# EAGLE board Motor Driver Rev 1.4 (EAGLE 7.6.0)
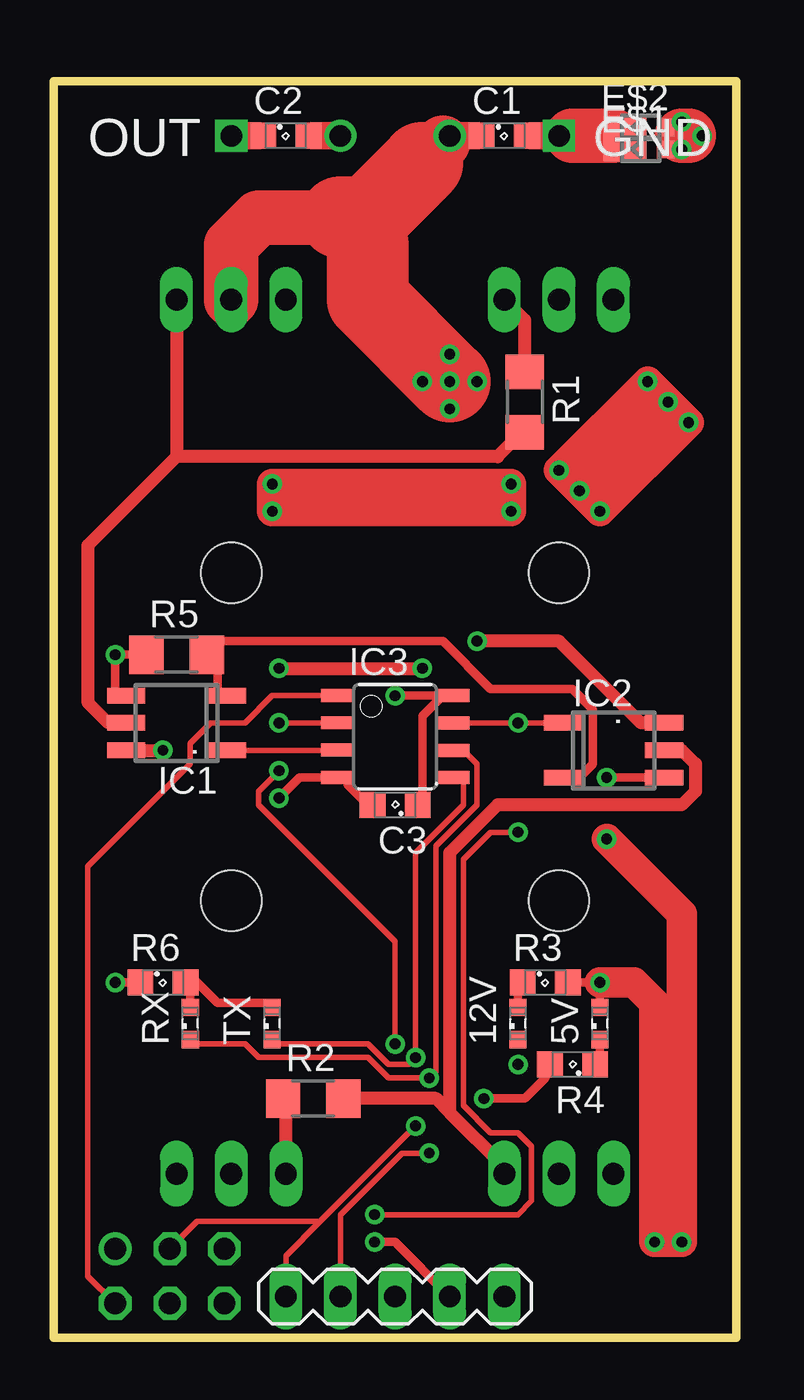
[diagram p0: board, top side]
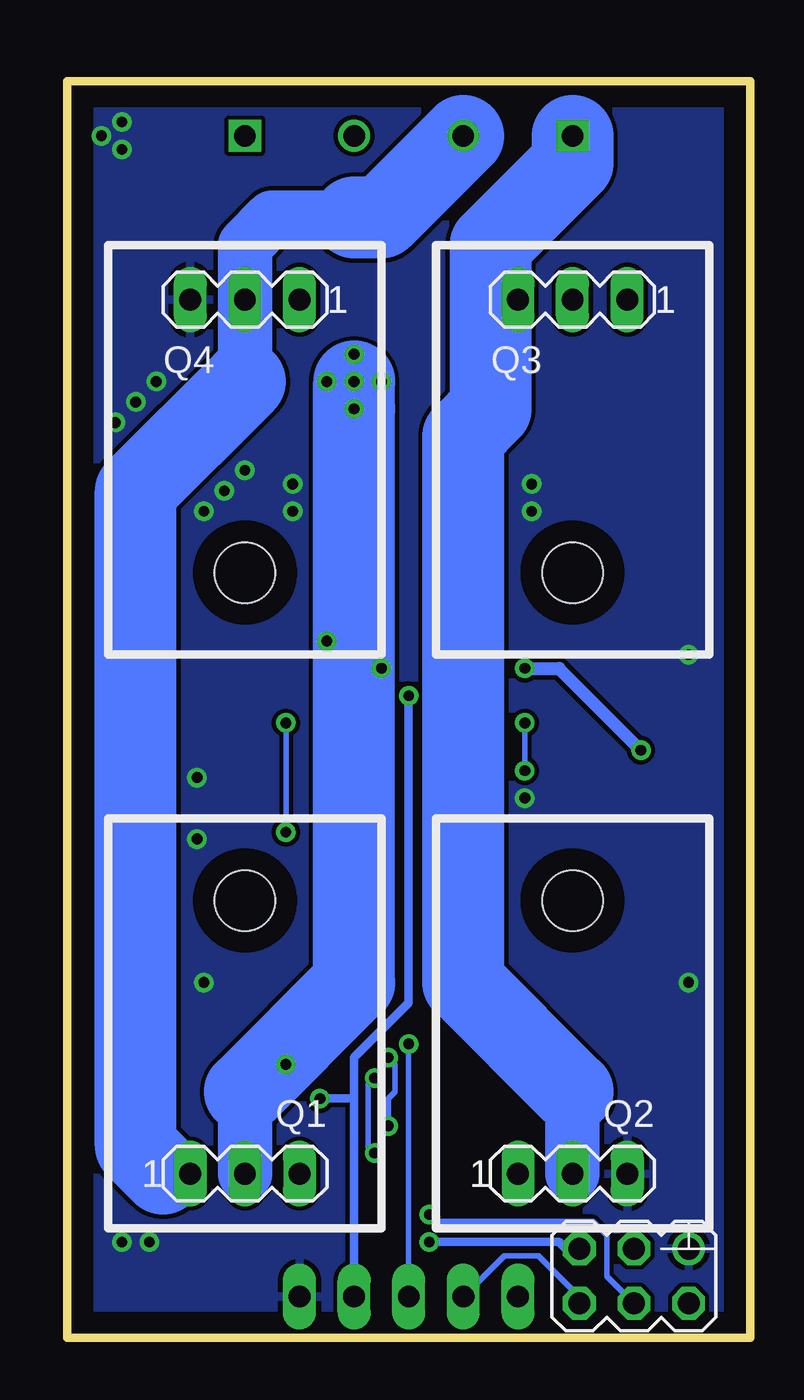
[diagram p1: board, bottom side, seen from below]

Size 31.75 x 58.42 mm. Coordinates in mm from the lower left corner, seen from the top.
Outline: 0,0 31.75,0 31.75,58.42 0,58.42 0,0
Copper layers (1*16): Top 0.035mm / dielectric 1.5mm / Bottom 0.035mm
Design rules "default": minimum track width 10mil, minimum drill 24mil, track to track 8mil, track to pad 8mil, pad to pad 8mil, via to via 8mil, smd to smd 8mil, copper to edge 40mil, drill to drill 8mil, minimum pad ring 10mil, minimum via ring 8mil, stop-mask expansion 4mil, vias tented up to drill 0mil, thermal gap 10mil
Holes 2.8 mm at 23.5,35.56 8.25,35.56 23.5,20.32 8.25,20.32

## Footprints (pad centres in the part's own frame; a part is rotated, then mirrored left to right if it is on the bottom)
SML0603 = smd 0.8 x 0.8: A 0.75,0; C -0.75,0
SML0805 = smd 1.2 x 1.2: A 1.05,0; C -1.05,0
POWERDI323 = smd 0.8 x 0.8: A 1.15,0 | smd 2 x 1.1: C -0.75,0
MA05-1 = drill 1.016 long: 2 -2.54,0; 3 0,0; 4 2.54,0; 5 5.08,0; GND -5.08,0
MA03-2 = drill 1.016 octagon: 2 -2.54,1.27; 3 0,-1.27; 4 0,1.27; 5 2.54,-1.27; 6 2.54,1.27 | drill 1.016: GND -2.54,-1.27
SOIC-6-5 = smd 0.72 x 1.78: 1 -1.905,-2.35; 3 0.635,-2.35; 6 0.635,2.35; 7 -0.635,2.35; 8 -1.905,2.35
8S1 = smd 0.6 x 1.6: 1 -1.905,-2.654; 2 -0.645,-2.654; 3 0.625,-2.654; 4 1.895,-2.654; 5 1.905,2.654; 6 0.635,2.654; 7 -0.635,2.654; 8 -1.905,2.654
MA03-1 = drill 1.016 long: 2 0,0; 3 2.54,0; GND -2.54,0
PT1206 = smd 1.6 x 1: 1A -1.4,-0.4; 1B -1.4,0.4; 2A 1.4,-0.4; 2B 1.4,0.4

## Placement (x,y rotation side)
5V  [SML0603]  25.4,14.6 90 top
12V  [SML0603]  21.59,14.6 90 top
C1  [SML0805]  20.95,55.88 0 top
C2  [SML0805]  10.8,55.88 0 top
C3  [SML0805]  15.88,24.77 180 top
E$1  [POWERDI323]  27.3,55.24 0 top  (not fitted)
E$2  [POWERDI323]  27.3,56.26 0 top  (not fitted)
E$3  [MA05-1]  15.88,1.91 0 top
E$4  [MA03-2]  5.4,2.86 180 bottom
IC1  [SOIC-6-5]  5.72,29.21 90 top
IC2  [SOIC-6-5]  26.03,26.67 270 top
IC3  [8S1]  15.88,27.94 270 top
Q1  [MA03-1]  23.5,7.62 180 bottom
Q2  [MA03-1]  8.25,7.62 180 bottom
Q3  [MA03-1]  8.25,48.26 0 bottom
Q4  [MA03-1]  23.5,48.26 0 bottom
R1  [PT1206]  21.91,43.5 270 top
R2  [PT1206]  12.06,11.11 0 top
R3  [SML0805]  22.86,16.51 0 top
R4  [SML0805]  24.13,12.7 180 top
R5  [PT1206]  5.72,31.75 0 top
R6  [SML0805]  5.08,16.51 0 top
RX  [SML0603]  6.35,14.6 90 top
TX  [SML0603]  10.16,14.6 90 top

## Library data of the parts
5V 12V C1-C3 R3 R4 R6 RX TX = led
E$1 E$2 = diode
E$3 E$4 Q1-Q4 = con-lstb
IC1 IC2 = ir
IC3 = atmel
R1 R2 R5 = sensor-heraeus

## Nets
GND: E$3.5 E$4.GND Q2.GND Q4.GND
S$7: Q3.2
S$11: Q1.2
S$13: Q4.2
S$17: Q2.2
S$19: E$4.2
S$22: Q4.3
S$25: Q3.3
S$26: Q2.3
S$28: E$3.2 E$4.6
S$30: Q1.GND
S$32: E$3.3
S$33: E$3.4 E$4.5
S$35: E$4.4
S$37: E$3.GND E$4.3

## Tracks (layer width: path | path; a pad name or v marks a point on that pad's centre or on a via)
GND  (via drill 0.5)
  Top 0.406: 27.62,26.04 v25.72,26.04 | 24.45,16.51 v25.4,16.51 25.4,15.24 | 3.49,16.51 v2.86,16.51 | 4.13,31.75 v2.86,31.75 2.86,29.84 | 12.7,26.04 11.43,26.04 v10.48,25.08
  Top 1.422: v24.45,39.37 v28.58,43.5 | v25.4,16.51 26.99,16.51 27.94,15.56 v27.94,4.45 v29.21,4.45 29.21,19.68 v25.72,23.18 | v23.5,40.32 v27.62,44.45 v29.53,42.54 v25.4,38.42 v23.5,40.32 | v21.27,39.69 v10.16,39.69 v10.16,38.42 v21.27,38.42 v21.27,39.69
  other vias: 29.21,56.51 30.16,55.88 29.21,55.24
  pour Bottom: 0,0 31.75,0 31.75,58.42 0,58.42
S$1
  Top 2.54: 26.03,55.88 24.13,55.88
S$2  (via drill 1)
  Top 1.27: 12.06,55.88 v13.33,55.88
  Bottom 3.81: v13.33,55.88 17.14,52.07 18.41,52.07
S$3  (via drill 1)
  Top 1.27: 9.53,55.88 v8.25,55.88
  Bottom 3.81: v8.25,55.88 8.25,54.61 12.06,50.8 12.06,43.18 13.33,41.91 13.33,16.51 8.25,11.43
S$4  (via drill 1)
  Top 1.27: 19.69,55.88 v18.41,55.88
S$5  (via drill 0.5)
  Top 3.81: v18.41,44.45 14.61,48.26 14.61,50.8
  Bottom 3.81: 23.5,11.43 18.41,16.51 v18.41,43.18 v18.41,44.45
S$6
  Top 2.54: 29.21,55.88 29.53,55.88
S$7
  Top 2.54: Q3.2 8.25,50.8 9.53,52.07 12.06,52.07
S$8  (via drill 1)
  Top 1.27: 22.22,55.88 v23.5,55.88
S$9
  Top 3.81: 17.14,54.61 14.61,52.07 13.33,52.07
S$10
  Top 0.254: 8.57,27.3 12.7,27.3
S$11
  Bottom 2.54: Q1.2 23.5,10.16
S$12  (via drill 0.5)
  other vias: 18.41,45.72
S$13
  Bottom 2.54: 19.69,52.07 22.22,52.07 23.5,50.8 Q4.2 23.5,44.45
  Bottom 3.81: 27.3,7.62 28.58,8.89 28.58,39.37 23.5,44.45
S$14  (via drill 0.5)
  other vias: 19.69,44.45
S$15  (via drill 0.5)
  other vias: 17.14,44.45
S$16
  Top 0.406: 13.65,26.04 13.65,25.72 14.61,24.77
S$17
  Bottom 2.54: Q2.2 8.25,10.16
S$18
  Top 0.406: 21.59,15.56 21.59,16.19
S$19
  Top 0.254: E$4.2 1.59,2.86 1.59,21.91 6.35,26.67 6.35,27.62 7.3,28.57 8.89,28.57 10.16,29.84 12.7,29.84
S$20
  Top 0.406: 24.45,26.04 25.08,26.67 25.08,29.21 24.13,30.16 20.32,30.16 18.1,32.38 7.62,32.38
S$21
  Top 0.406: 7.62,29.84 7.62,31.12
S$22
  Top 0.61: 21.91,44.77 21.91,47.31 Q4.3
S$23  (via drill 0.5)
  Top 0.61: v10.48,31.12 v17.14,31.12 | 3.81,27.3 v5.08,27.3
  Bottom 0.61: v10.48,31.12 8.89,31.12 v5.08,27.3
S$24  (via drill 0.5)
  Top 0.61: 27.94,28.57 27.3,28.57 23.5,32.38 v19.69,32.38
S$25
  Top 0.61: 21.91,42.23 20.64,40.96 5.72,40.96 | 5.72,40.96 1.59,36.83 1.59,29.53 2.54,28.57 | Q3.3 5.72,40.96
S$26
  Top 0.61: Q2.3 10.8,11.11
S$27
  Top 0.406: 25.4,13.02 25.4,13.65
S$28  (via drill 0.5)
  Top 0.254: 6.35,13.65 8.89,13.65 9.53,13.02 14.61,13.02 15.56,12.06 v17.46,12.06 17.78,12.38 17.78,22.86 19.69,24.77 19.69,26.67 19.05,27.3 | E$3.2 13.33,5.71 16.19,8.57 v17.46,8.57
  Bottom 0.254: E$4.6 7.94,1.91 9.84,3.81 11.43,3.81 E$3.2 | v17.46,8.57 17.78,8.89 17.78,11.75 v17.46,12.06
S$29
  Top 2.54: 17.78,55.24 18.1,55.56
S$30
  Top 0.61: 28.89,27.3 29.21,27.3 29.84,26.67 29.84,25.4 29.21,24.77 20.64,24.77 18.41,22.54 18.41,10.48 | Q1.GND 20.95,7.94 18.41,10.48 | 18.41,10.48 17.78,11.11 13.65,11.11
S$31  (via drill 0.5)
  other vias: 21.59,12.7
S$32  (via drill 0.5)
  Top 0.254: v15.88,13.65 15.88,18.41 9.53,24.77 9.53,25.4 v10.48,26.35 | 12.7,28.57 v10.48,28.57
  Bottom 0.254: E$3.3 v15.88,13.65 | v10.48,26.35 v10.48,28.57
S$33  (via drill 0.5)
  Top 0.406: 17.14,24.77 17.14,28.89 18.1,29.84 v15.88,29.84 | v14.92,4.45 15.88,4.45 E$3.4 | v20,11.11 21.91,11.11 22.86,12.06 22.86,12.7
  Bottom 0.406: E$4.5 8.57,4.13 8.89,4.45 v14.92,4.45 | v15.88,29.84 15.88,15.56 18.41,13.02 18.41,11.11 | E$3.4 18.41,11.11 | v20,11.11 18.41,11.11
S$34
  Top 0.406: 6.35,15.56 6.35,16.19
S$35  (via drill 0.5)
  Top 0.254: 23.18,28.57 v21.59,28.57 19.05,28.57 | v21.59,23.49 20.32,23.49 19.05,22.23 19.05,10.8 20.32,9.52 21.59,9.52 22.22,8.89 22.22,6.35 21.59,5.71 v14.92,5.71
  Bottom 0.254: v21.59,28.57 v21.59,23.49 | E$4.4 6.67,2.86 6.67,4.76 7.3,5.4 14.61,5.4 v14.92,5.71
S$36
  Top 0.406: 10.16,15.56 7.62,15.56 6.35,16.83
S$37  (via drill 0.5)
  Top 0.254: 10.16,13.65 14.61,13.65 15.56,12.7 16.51,12.7 v16.83,13.02 16.83,22.54 19.05,24.77 19.05,26.04 | E$4.3 6.67,5.4 12.38,5.4 | E$3.GND 10.8,3.81 12.38,5.4 | 12.38,5.4 v16.83,9.84
  Bottom 0.254: v16.83,9.84 16.83,11.11 16.51,11.43 16.51,12.7 v16.83,13.02

## Text on the board
tPlace: OUT | GND